# Altium PCB Analog.PcbDoc (part 2 of 2)
Units mil, origin at the board's own origin, x right, y up, seen from the top; angles counter-clockwise.
Board outline 2755 x 2460 mil, 4 copper layers (Top Layer, Power, Ground, Bottom Layer), stack 30.634 mil thick; 173 components, 144 nets, 556 pads, 140 vias.
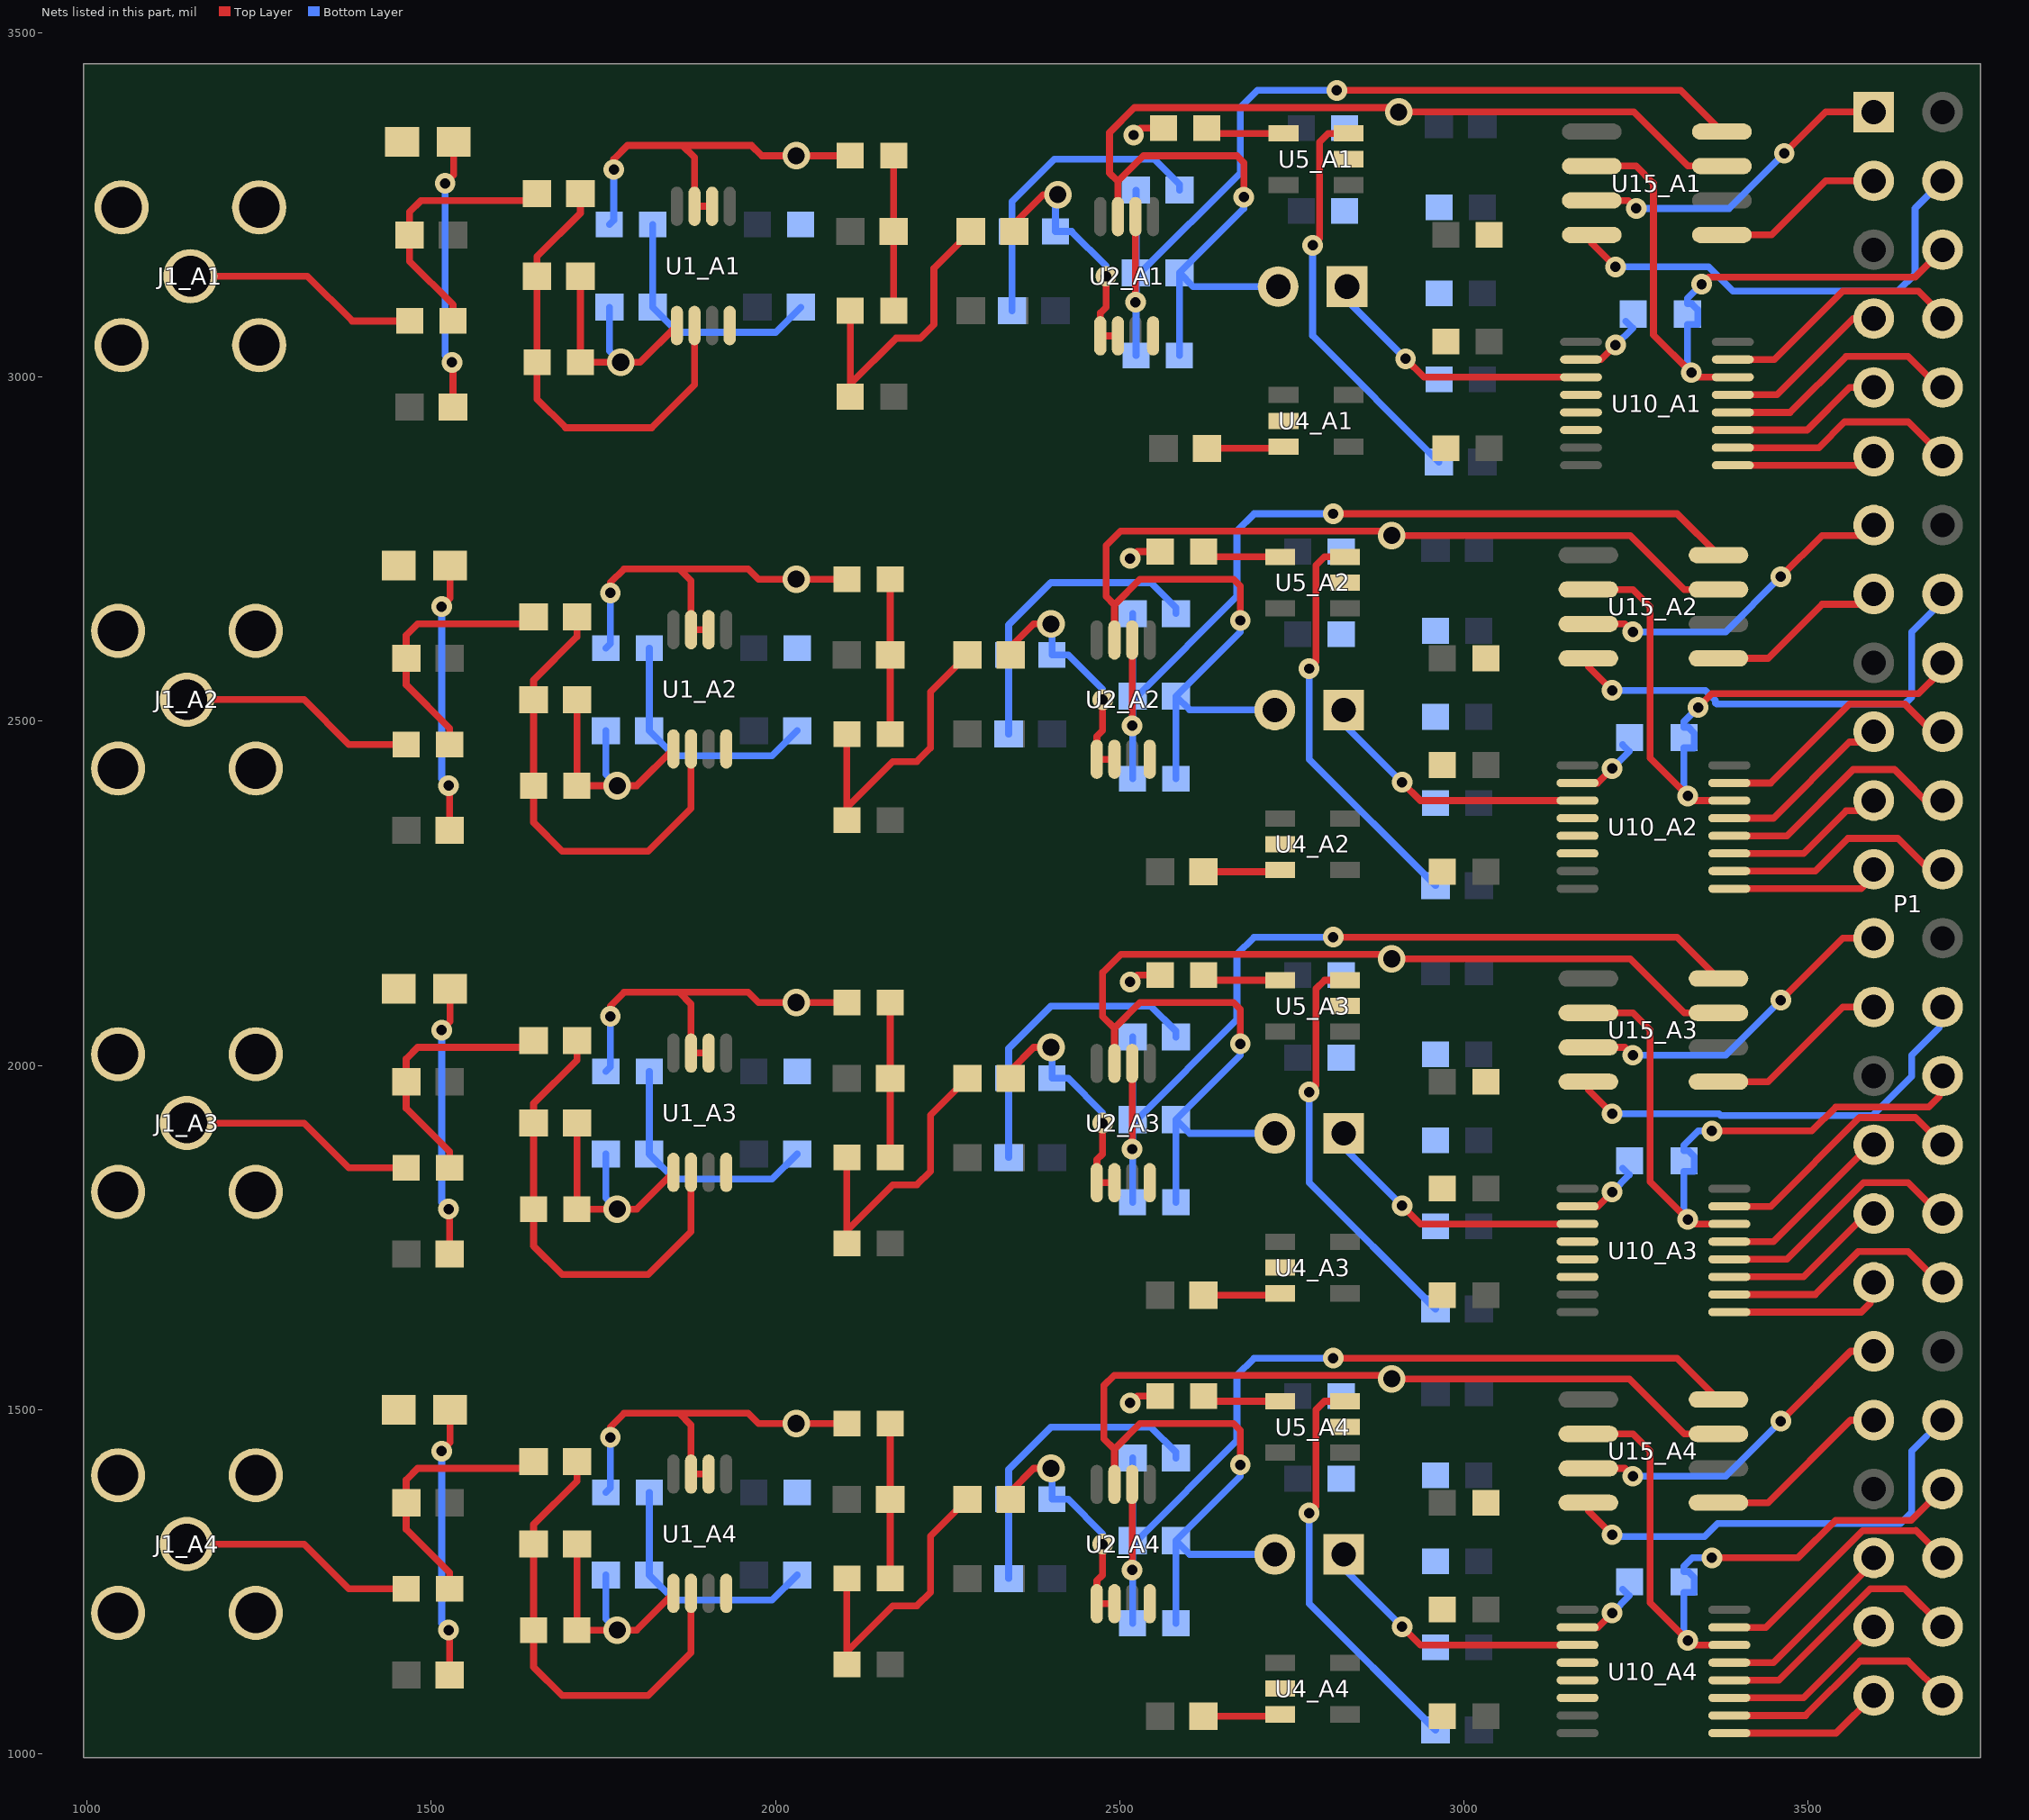
[diagram p4: the nets of this part, all layers, seen from the top]

## Via types
v1: diameter 30, hole 15, Top Layer to Bottom Layer, tented both sides, 124 vias
v2: diameter 40, hole 25, Top Layer to Bottom Layer, 16 vias

## Nets (pads, with @x,y where several pads share a name; then routed paths per layer and width w, separated by ;. In a path a pad name is that pad's centre, name@x,y a point inside that pad or via, vN(x,y) a via of type N, cw(c..) or ccw(c..) an arc to the next point about the centre after c; other vN are vias at no path point) (continued)
+INB2_A1: C3_A1.1 DNP_A1.1 R29_A1.2 U2_A1.6 U15_A1.8 | length 1405.7
  Top Layer w10: v1(2522.8,3108.7) U2_A1.6@2522.8,3233.11 ; v1(2815,3416.5) 3314.49,3416.5 U15_A1.8@3374.49,3356.5
  Bottom Layer w10: C3_A1.1@2523.5,3031.5 DNP_A1.1@2523.5,3151.5 ; R29_A1.2@2523.5,3271.5 DNP_A1.1@2523.5,3151.5 ; v1(2815,3416.5) 2700,3416.5 2675,3391.5 2675,3296.5 2530,3151.5 DNP_A1.1@2523.5,3151.5
+INB2_A2: C3_A2.1 DNP_A2.1 R29_A2.2 U2_A2.6 U15_A2.8 | length 1405.7
  Top Layer w10: v1(2517.8,2493.7) U2_A2.6@2517.8,2618.11 ; v1(2810,2801.5) 3309.49,2801.5 U15_A2.8@3369.49,2741.5
  Bottom Layer w10: C3_A2.1@2518.5,2416.5 DNP_A2.1@2518.5,2536.5 ; R29_A2.2@2518.5,2656.5 DNP_A2.1@2518.5,2536.5 ; v1(2810,2801.5) 2695,2801.5 2670,2776.5 2670,2681.5 2525,2536.5 DNP_A2.1@2518.5,2536.5
+INB2_A3: C3_A3.1 DNP_A3.1 R29_A3.2 U2_A3.6 U15_A3.8 | length 1405.7
  Top Layer w10: v1(2517.8,1878.7) U2_A3.6@2517.8,2003.11 ; v1(2810,2186.5) 3309.49,2186.5 U15_A3.8@3369.49,2126.5
  Bottom Layer w10: C3_A3.1@2518.5,1801.5 DNP_A3.1@2518.5,1921.5 ; R29_A3.2@2518.5,2041.5 DNP_A3.1@2518.5,1921.5 ; v1(2810,2186.5) 2695,2186.5 2670,2161.5 2670,2066.5 2525,1921.5 DNP_A3.1@2518.5,1921.5
+INB2_A4: C3_A4.1 DNP_A4.1 R29_A4.2 U2_A4.6 U15_A4.8 | length 1405.7
  Top Layer w10: v1(2517.8,1267.2) U2_A4.6@2517.8,1391.61 ; v1(2810,1575) 3309.49,1575 U15_A4.8@3369.49,1515
  Bottom Layer w10: C3_A4.1@2518.5,1190 DNP_A4.1@2518.5,1310 ; R29_A4.2@2518.5,1430 DNP_A4.1@2518.5,1310 ; v1(2810,1575) 2695,1575 2670,1550 2670,1455 2525,1310 DNP_A4.1@2518.5,1310
-INA1_A1: C2_A1.1 R1_A1.1 R16_A1.2 U1_A1.2 | length 682.4
  Top Layer w10: R16_A1.2@1716.5,3266.5 1716.5,3237.99 1653.5,3175 R1_A1.1@1653.5,3146.5 C2_A1.1@1653.5,3021.5 1653.5,2967.99 1695,2926.5 1820,2926.5 1882.2,2988.7 U1_A1.2@1882.2,3074.88
-INA1_A2: C2_A2.1 R1_A2.1 R16_A2.2 U1_A2.2 | length 682.4
  Top Layer w10: R16_A2.2@1711.5,2651.5 1711.5,2622.99 1648.5,2560 R1_A2.1@1648.5,2531.5 C2_A2.1@1648.5,2406.5 1648.5,2352.99 1690,2311.5 1815,2311.5 1877.2,2373.7 U1_A2.2@1877.2,2459.88
-INA1_A3: C2_A3.1 R1_A3.1 R16_A3.2 U1_A3.2 | length 682.4
  Top Layer w10: R16_A3.2@1711.5,2036.5 1711.5,2007.99 1648.5,1945 R1_A3.1@1648.5,1916.5 C2_A3.1@1648.5,1791.5 1648.5,1737.99 1690,1696.5 1815,1696.5 1877.2,1758.7 U1_A3.2@1877.2,1844.88
-INA1_A4: C2_A4.1 R1_A4.1 R16_A4.2 U1_A4.2 | length 682.4
  Top Layer w10: R16_A4.2@1711.5,1425 1711.5,1396.5 1648.5,1333.5 R1_A4.1@1648.5,1305 C2_A4.1@1648.5,1180 1648.5,1126.5 1690,1085 1815,1085 1877.2,1147.2 U1_A4.2@1877.2,1233.39
ADC_CE1: P1.9 U10_A1.11 | length 230.4
  Top Layer w10: U10_A1.11@3390.24,2923.11 3498.11,2923.11 3560,2985 P1.9@3595,2985
ADC_CE2: P1.21 U10_A2.11 | length 230.4
  Top Layer w10: U10_A2.11@3385.24,2308.11 3493.11,2308.11 3555,2370 P1.21@3590,2370
ADC_CE3: P1.33 U10_A3.11 | length 244.9
  Top Layer w10: U10_A3.11@3385.24,1693.11 3493.11,1693.11 P1.33@3590,1790
ADC_CE4: P1.45 U10_A4.11 | length 244.9
  Top Layer w10: U10_A4.11@3385.24,1081.61 3493.11,1081.61 P1.45@3590,1178.5
ADC_MISO1: P1.7 U10_A1.13 | length 250.6
  Top Layer w10: U10_A1.13@3390.24,2974.29 3454.29,2974.29 3565,3085 P1.7@3595,3085
ADC_MISO2: P1.19 U10_A2.13 | length 250.6
  Top Layer w10: U10_A2.13@3385.24,2359.29 3449.29,2359.29 3560,2470 P1.19@3590,2470
ADC_MISO3: P1.31 U10_A3.13 | length 266.6
  Top Layer w10: U10_A3.13@3385.24,1744.29 3449.29,1744.29 P1.31@3592.5,1887.5
ADC_MISO4: P1.43 U10_A4.13 | length 263
  Top Layer w10: U10_A4.13@3385.24,1132.8 3449.29,1132.8 P1.43@3590,1273.5
ADC_MOSI1: P1.10 U10_A1.12 | length 357.1
  Top Layer w10: U10_A1.12@3390.24,2948.7 3473.7,2948.7 3555,3030 3645,3030 3690,2985 P1.10@3695,2985
ADC_MOSI2: P1.22 U10_A2.12 | length 369.5
  Top Layer w10: U10_A2.12@3385.24,2333.7 3468.7,2333.7 3565,2430 3625,2430 3685,2370 P1.22@3690,2370
ADC_MOSI3: P1.34 U10_A3.12 | length 404.5
  Top Layer w10: U10_A3.12@3385.24,1718.7 3468.7,1718.7 3580,1830 3645,1830 P1.34@3690,1785 ; P1.34@3677.5,1767.5 P1.34@3677.5,1802.5
ADC_MOSI4: P1.46 U10_A4.12 | length 387.6
  Top Layer w10: U10_A4.12@3385.24,1107.2 3457.2,1107.2 3590,1240 3640,1240 P1.46@3695,1185
ADC_SCK1: P1.8 U10_A1.15 | length 365.5
  Top Layer w10: U10_A1.15@3390.24,3025.47 3450.47,3025.47 3550,3125 3660,3125 3695,3090 P1.8@3695,3085
ADC_SCK2: P1.20 U10_A2.15 | length 377.9
  Top Layer w10: U10_A2.15@3385.24,2410.47 3445.47,2410.47 3560,2525 3640,2525 3690,2475 P1.20@3690,2470
ADC_SCK3: P1.32 U10_A3.15 | length 379.6
  Top Layer w10: U10_A3.15@3385.24,1795.47 3445.47,1795.47 3574.53,1924.53 3655.47,1924.53 P1.32@3695,1885
ADC_SCK4: P1.44 U10_A4.15 | length 385.5
  Top Layer w10: U10_A4.15@3385.24,1183.98 3438.08,1183.98 3578.63,1324.53 3655.74,1324.53 3656.21,1325 3695,1286.21 P1.44@3695,1285
AGND_A1: C1_A1.1 C5_A1.1 C6_A1.1 C7_A1.1 C8_A1.1 C42_A1.1 C50_A1.2 C61_A1.2 C62_A1.2 C63_A1.2 D1_A1.1 J1_A1.2 NT1_A1.1 U1_A1.4 U2_A1.4 U4_A1.2 U5_A1.2 U10_A1.2 U10_A1.4 U10_A1.5 U10_A1.6 | length 155.8
  Top Layer w10: v1(2520,3351.5) 2530,3361.5 C8_A1.1@2563.5,3361.5 ; U10_A1.2@3169.76,3025.47 3198.98,3025.47 v1(3220,3046.5)
  Bottom Layer w10: v1(3220,3046.5) 3245,3071.5 3244.42,3071.5 NT1_A1.1@3235.02,3080.89
AGND_A2: C1_A2.1 C5_A2.1 C6_A2.1 C7_A2.1 C8_A2.1 C42_A2.1 C50_A2.2 C61_A2.2 C62_A2.2 C63_A2.2 D1_A2.1 J1_A2.2 NT1_A2.1 U1_A2.4 U2_A2.4 U4_A2.2 U5_A2.2 U10_A2.2 U10_A2.4 U10_A2.5 U10_A2.6 | length 155.8
  Top Layer w10: v1(2515,2736.5) 2525,2746.5 C8_A2.1@2558.5,2746.5 ; U10_A2.2@3164.76,2410.47 3193.98,2410.47 v1(3215,2431.5)
  Bottom Layer w10: v1(3215,2431.5) 3240,2456.5 3239.42,2456.5 NT1_A2.1@3230.02,2465.89
AGND_A3: C1_A3.1 C5_A3.1 C6_A3.1 C7_A3.1 C8_A3.1 C42_A3.1 C50_A3.2 C61_A3.2 C62_A3.2 C63_A3.2 D1_A3.1 J1_A3.2 NT1_A3.1 U1_A3.4 U2_A3.4 U4_A3.2 U5_A3.2 U10_A3.2 U10_A3.4 U10_A3.5 U10_A3.6 | length 155.8
  Top Layer w10: v1(2515,2121.5) 2525,2131.5 C8_A3.1@2558.5,2131.5 ; U10_A3.2@3164.76,1795.47 3193.98,1795.47 v1(3215,1816.5)
  Bottom Layer w10: v1(3215,1816.5) 3240,1841.5 3239.42,1841.5 NT1_A3.1@3230.02,1850.89
AGND_A4: C1_A4.1 C5_A4.1 C6_A4.1 C7_A4.1 C8_A4.1 C42_A4.1 C50_A4.2 C61_A4.2 C62_A4.2 C63_A4.2 D1_A4.1 J1_A4.2 NT1_A4.1 U1_A4.4 U2_A4.4 U4_A4.2 U5_A4.2 U10_A4.2 U10_A4.4 U10_A4.5 U10_A4.6 | length 155.8
  Top Layer w10: v1(2515,1510) 2525,1520 C8_A4.1@2558.5,1520 ; U10_A4.2@3164.76,1183.98 3193.98,1183.98 v1(3215,1205)
  Bottom Layer w10: v1(3215,1205) 3240,1230 3239.42,1230 NT1_A4.1@3230.02,1239.39
CONVST1: P1.11 U10_A1.9 | length 210.2
  Top Layer w10: U10_A1.9@3390.24,2871.93 3581.93,2871.93 P1.11@3595,2885
CONVST2: P1.23 U10_A2.9 | length 210.2
  Top Layer w10: U10_A2.9@3385.24,2256.93 3576.93,2256.93 P1.23@3590,2270
CONVST3: P1.35 U10_A3.9 | length 210.2
  Top Layer w10: U10_A3.9@3385.24,1641.93 3576.93,1641.93 3590,1655
CONVST4: P1.47 U10_A4.9 | length 232.4
  Top Layer w10: U10_A4.9@3385.24,1030.43 3540.43,1030.43 P1.47@3595,1085
DGND1: NT1_A1.2 P1.6 U10_A1.14 U15_A1.2 | length 995.5
  Top Layer w10: U15_A1.2@3185.51,3306.5 3250,3306.5 3275,3281.5 3275,3061.5 v1(3330,3006.5) 3336.61,2999.88 U10_A1.14@3390.24,2999.88 ; v1(3345,3135) 3355,3145 3655,3145 P1.6@3695,3185
  Bottom Layer w10: v1(3330,3006.5) 3324.37,3012.13 3324.37,3076.5 3339.37,3076.5 3339.37,3097.71 3330.58,3106.5 3324.37,3106.5 3324.37,3114.37 v1(3345,3135)
DGND2: NT1_A2.2 P1.18 U10_A2.14 U15_A2.2 | length 995.5
  Top Layer w10: U15_A2.2@3180.51,2691.5 3245,2691.5 3270,2666.5 3270,2446.5 v1(3325,2391.5) 3331.61,2384.88 U10_A2.14@3385.24,2384.88 ; v1(3340,2520) 3360,2540 3660,2540 P1.18@3690,2570
  Bottom Layer w10: v1(3325,2391.5) 3319.37,2397.13 3319.37,2461.5 3334.37,2461.5 3334.37,2482.71 3325.58,2491.5 3319.37,2491.5 3319.37,2499.37 v1(3340,2520)
DGND3: NT1_A3.2 P1.30 U10_A3.14 U15_A3.2 | length 995.5
  Top Layer w10: U15_A3.2@3180.51,2076.5 3245,2076.5 3270,2051.5 3270,1831.5 v1(3325,1776.5) 3331.61,1769.88 U10_A3.14@3385.24,1769.88 ; v1(3360,1905) 3505,1905 3540,1940 3675,1940 3690,1955
  Bottom Layer w10: v1(3325,1776.5) 3319.37,1782.13 3319.37,1846.5 3334.37,1846.5 3334.37,1867.71 3325.58,1876.5 3319.37,1876.5 3319.37,1884.37 3340,1905 v1(3360,1905)
DGND4: NT1_A4.2 P1.42 U10_A4.14 U15_A4.2 | length 1017.7
  Top Layer w10: U15_A4.2@3180.51,1465 3245,1465 3270,1440 3270,1220 v1(3325,1165) 3331.61,1158.39 U10_A4.14@3385.24,1158.39 ; v1(3360,1285) 3485,1285 3539.53,1339.53 3649.53,1339.53 P1.42@3695,1385
  Bottom Layer w10: v1(3325,1165) 3319.37,1170.63 3319.37,1235 3334.37,1235 3334.37,1256.21 3325.58,1265 3319.37,1265 3319.37,1272.87 3331.5,1285 v1(3360,1285)
EOC1: P1.12 U10_A1.10 | length 341
  Top Layer w10: U10_A1.10@3390.24,2897.52 3515.15,2897.52 3552.63,2935 3645,2935 P1.12@3695,2885
EOC2: P1.24 U10_A2.10 | length 349.3
  Top Layer w10: U10_A2.10@3385.24,2282.52 3510.15,2282.52 3557.63,2330 3630,2330 P1.24@3690,2270
EOC3: P1.36 U10_A3.10 | length 370.5
  Top Layer w10: U10_A3.10@3385.24,1667.52 3510.15,1667.52 3572.63,1730 3645,1730 P1.36@3705,1670
EOC4: P1.48 U10_A4.10 | length 363.2
  Top Layer w10: U10_A4.10@3385.24,1056.02 3496.02,1056.02 3575,1135 3645,1135 P1.48@3695,1085
NetBP_A1_1: BP_A1.1 U10_A1.3 | length 406
  Top Layer w10: v1(2915,3026.5) 2941.61,2999.88 U10_A1.3@3169.76,2999.88
  Bottom Layer w10: BP_A1.1@2830,3131.5 2830,3111.5 v1(2915,3026.5)
NetBP_A2_1: BP_A2.1 U10_A2.3 | length 406
  Top Layer w10: v1(2910,2411.5) 2936.61,2384.88 U10_A2.3@3164.76,2384.88
  Bottom Layer w10: BP_A2.1@2825,2516.5 2825,2496.5 v1(2910,2411.5)
NetBP_A3_1: BP_A3.1 U10_A3.3 | length 406
  Top Layer w10: v1(2910,1796.5) 2936.61,1769.88 U10_A3.3@3164.76,1769.88
  Bottom Layer w10: BP_A3.1@2825,1901.5 2825,1881.5 v1(2910,1796.5)
NetBP_A4_1: BP_A4.1 U10_A4.3 | length 406
  Top Layer w10: v1(2910,1185) 2936.61,1158.39 U10_A4.3@3164.76,1158.39
  Bottom Layer w10: BP_A4.1@2825,1290 2825,1270 v1(2910,1185)
NetC4_A1_2: C4_A1.2 R2_A1.2 R16_A1.1 | length 380.6
  Top Layer w10: C4_A1.2@1531.5,3081.5 1531.5,3105 1468.5,3167.99 R2_A1.2@1468.5,3206.5 1468.5,3240 1485,3256.5 1643.5,3256.5 R16_A1.1@1653.5,3266.5
NetC4_A2_2: C4_A2.2 R2_A2.2 R16_A2.1 | length 380.6
  Top Layer w10: C4_A2.2@1526.5,2466.5 1526.5,2490 1463.5,2552.99 R2_A2.2@1463.5,2591.5 1463.5,2625 1480,2641.5 1638.5,2641.5 R16_A2.1@1648.5,2651.5
NetC4_A3_2: C4_A3.2 R2_A3.2 R16_A3.1 | length 380.6
  Top Layer w10: C4_A3.2@1526.5,1851.5 1526.5,1875 1463.5,1937.99 R2_A3.2@1463.5,1976.5 1463.5,2010 1480,2026.5 1638.5,2026.5 R16_A3.1@1648.5,2036.5
NetC4_A4_2: C4_A4.2 R2_A4.2 R16_A4.1 | length 380.6
  Top Layer w10: C4_A4.2@1526.5,1240 1526.5,1263.5 1463.5,1326.5 R2_A4.2@1463.5,1365 1463.5,1398.5 1480,1415 1638.5,1415 R16_A4.1@1648.5,1425
NetC8_A1_2: C8_A1.2 U5_A1.4 | length 114.4
  Top Layer w10: C8_A1.2@2626.5,3361.5 2634.09,3353.9 U5_A1.4@2737.76,3353.9
NetC8_A2_2: C8_A2.2 U5_A2.4 | length 114.4
  Top Layer w10: C8_A2.2@2621.5,2746.5 2629.09,2738.9 U5_A2.4@2732.76,2738.9
NetC8_A3_2: C8_A3.2 U5_A3.4 | length 114.4
  Top Layer w10: C8_A3.2@2621.5,2131.5 2629.09,2123.9 U5_A3.4@2732.76,2123.9
NetC8_A4_2: C8_A4.2 U5_A4.4 | length 114.4
  Top Layer w10: C8_A4.2@2621.5,1520 2629.09,1512.4 U5_A4.4@2732.76,1512.4
NetC23_A1_2: C23_A1.2 C27_A1.1 R3_A1.2 | length 225
  Top Layer w10: C27_A1.1@2171.5,3096.5 R3_A1.2@2171.5,3211.5 C23_A1.2@2171.5,3321.5
NetC23_A2_2: C23_A2.2 C27_A2.1 R3_A2.2 | length 225
  Top Layer w10: C27_A2.1@2166.5,2481.5 R3_A2.2@2166.5,2596.5 C23_A2.2@2166.5,2706.5
NetC23_A3_2: C23_A3.2 C27_A3.1 R3_A3.2 | length 225
  Top Layer w10: C27_A3.1@2166.5,1866.5 R3_A3.2@2166.5,1981.5 C23_A3.2@2166.5,2091.5
NetC23_A4_2: C23_A4.2 C27_A4.1 R3_A4.2 | length 225
  Top Layer w10: C27_A4.1@2166.5,1255 R3_A4.2@2166.5,1370 C23_A4.2@2166.5,1480
NetC27_A1_2: C27_A1.2 C28_A1.1 R39_A1.1 | length 439.5
  Top Layer w10: C28_A1.1@2108.5,2971.5 C28_A1.1@2108.5,2990 ; C27_A1.2@2108.5,3096.5 C28_A1.1@2108.5,2990 ; R39_A1.1@2283.5,3211.5 2230,3157.99 2230,3076.5 2210,3056.5 2175,3056.5 C28_A1.1@2108.5,2990
NetC27_A2_2: C27_A2.2 C28_A2.1 R39_A2.1 | length 439.5
  Top Layer w10: C28_A2.1@2103.5,2356.5 C28_A2.1@2103.5,2375 ; C27_A2.2@2103.5,2481.5 C28_A2.1@2103.5,2375 ; R39_A2.1@2278.5,2596.5 2225,2542.99 2225,2461.5 2205,2441.5 2170,2441.5 C28_A2.1@2103.5,2375
NetC27_A3_2: C27_A3.2 C28_A3.1 R39_A3.1 | length 439.5
  Top Layer w10: C28_A3.1@2103.5,1741.5 C28_A3.1@2103.5,1760 ; C27_A3.2@2103.5,1866.5 C28_A3.1@2103.5,1760 ; R39_A3.1@2278.5,1981.5 2225,1927.99 2225,1846.5 2205,1826.5 2170,1826.5 C28_A3.1@2103.5,1760
NetC27_A4_2: C27_A4.2 C28_A4.1 R39_A4.1 | length 439.5
  Top Layer w10: C28_A4.1@2103.5,1130 C28_A4.1@2103.5,1148.5 ; C27_A4.2@2103.5,1255 C28_A4.1@2103.5,1148.5 ; R39_A4.1@2278.5,1370 2225,1316.5 2225,1235 2205,1215 2170,1215 C28_A4.1@2103.5,1148.5
NetC41_A1_2: C41_A1.2 R4_A1.2 R29_A1.1 | length 450.6
  Bottom Layer w10: R4_A1.2@2343.5,3096.5 C41_A1.2@2343.5,3211.5 2343.5,3255 2405,3316.5 2550,3316.5 2586.5,3280 R29_A1.1@2586.5,3271.5
NetC41_A2_2: C41_A2.2 R4_A2.2 R29_A2.1 | length 450.6
  Bottom Layer w10: R4_A2.2@2338.5,2481.5 C41_A2.2@2338.5,2596.5 2338.5,2640 2400,2701.5 2545,2701.5 2581.5,2665 R29_A2.1@2581.5,2656.5
NetC41_A3_2: C41_A3.2 R4_A3.2 R29_A3.1 | length 450.6
  Bottom Layer w10: R4_A3.2@2338.5,1866.5 C41_A3.2@2338.5,1981.5 2338.5,2025 2400,2086.5 2545,2086.5 2581.5,2050 R29_A3.1@2581.5,2041.5
NetC41_A4_2: C41_A4.2 R4_A4.2 R29_A4.1 | length 450.6
  Bottom Layer w10: R4_A4.2@2338.5,1255 C41_A4.2@2338.5,1370 2338.5,1413.5 2400,1475 2545,1475 2581.5,1438.5 R29_A4.1@2581.5,1430
NetC43_A1_2: C43_A1.2 R32_A1.2 R33_A1.1 | length 365.2
  Bottom Layer w10: C43_A1.2@1821.5,3221.5 R32_A1.2@1821.5,3101.5 1857.99,3065 2000,3065 R33_A1.1@2036.5,3101.5
NetC43_A2_2: C43_A2.2 R32_A2.2 R33_A2.1 | length 365.2
  Bottom Layer w10: C43_A2.2@1816.5,2606.5 R32_A2.2@1816.5,2486.5 1852.99,2450 1995,2450 R33_A2.1@2031.5,2486.5
NetC43_A3_2: C43_A3.2 R32_A3.2 R33_A3.1 | length 365.2
  Bottom Layer w10: C43_A3.2@1816.5,1991.5 R32_A3.2@1816.5,1871.5 1852.99,1835 1995,1835 R33_A3.1@2031.5,1871.5
NetC43_A4_2: C43_A4.2 R32_A4.2 R33_A4.1 | length 365.2
  Bottom Layer w10: C43_A4.2@1816.5,1380 R32_A4.2@1816.5,1260 1852.99,1223.5 1995,1223.5 R33_A4.1@2031.5,1260
NetD1_A1_2: D1_A1.2 R7_A1.2 | length 392.8
  Top Layer w10: v1(1520,3281.5) 1532.4,3293.9 D1_A1.2@1532.4,3341.5 ; R7_A1.2@1531.5,2956.5 v1@1531.5,3020
  Bottom Layer w10: v1(1520,3281.5) 1520,3031.5 v1(1530,3021.5)
NetD1_A2_2: D1_A2.2 R7_A2.2 | length 392.8
  Top Layer w10: v1(1515,2666.5) 1527.4,2678.9 D1_A2.2@1527.4,2726.5 ; R7_A2.2@1526.5,2341.5 v1@1526.5,2405
  Bottom Layer w10: v1(1515,2666.5) 1515,2416.5 v1(1525,2406.5)
NetD1_A3_2: D1_A3.2 R7_A3.2 | length 392.8
  Top Layer w10: v1(1515,2051.5) 1527.4,2063.9 D1_A3.2@1527.4,2111.5 ; R7_A3.2@1526.5,1726.5 v1@1526.5,1790
  Bottom Layer w10: v1(1515,2051.5) 1515,1801.5 v1(1525,1791.5)
NetD1_A4_2: D1_A4.2 R7_A4.2 | length 392.8
  Top Layer w10: v1(1515,1440) 1527.4,1452.4 D1_A4.2@1527.4,1500 ; R7_A4.2@1526.5,1115 v1@1526.5,1178.5
  Bottom Layer w10: v1(1515,1440) 1515,1190 v1(1525,1180)
NetR5_A1_1: R5_A1.1 U4_A1.3 | length 112.3
  Top Layer w10: R5_A1.1@2626.5,2896.5 2735.16,2896.5 U4_A1.3@2737.76,2899.09
NetR5_A2_1: R5_A2.1 U4_A2.3 | length 112.3
  Top Layer w10: R5_A2.1@2621.5,2281.5 2730.16,2281.5 U4_A2.3@2732.76,2284.09
NetR5_A3_1: R5_A3.1 U4_A3.3 | length 112.3
  Top Layer w10: R5_A3.1@2621.5,1666.5 2730.16,1666.5 U4_A3.3@2732.76,1669.09
NetR5_A4_1: R5_A4.1 U4_A4.3 | length 112.3
  Top Layer w10: R5_A4.1@2621.5,1055 2730.16,1055 U4_A4.3@2732.76,1057.6
NetR8_A1_1: R8_A1.1 U5_A1.3 | length 592.5
  Top Layer w10: v1(2780,3191.5) 2790,3201.5 2790,3341.5 2802.4,3353.9 U5_A1.3@2832.24,3353.9
  Bottom Layer w10: v1(2780,3191.5) 2780,3060 R8_A1.1@2963.5,2876.5
NetR8_A2_1: R8_A2.1 U5_A2.3 | length 592.5
  Top Layer w10: v1(2775,2576.5) 2785,2586.5 2785,2726.5 2797.4,2738.9 U5_A2.3@2827.24,2738.9
  Bottom Layer w10: v1(2775,2576.5) 2775,2445 R8_A2.1@2958.5,2261.5
NetR8_A3_1: R8_A3.1 U5_A3.3 | length 592.5
  Top Layer w10: v1(2775,1961.5) 2785,1971.5 2785,2111.5 2797.4,2123.9 U5_A3.3@2827.24,2123.9
  Bottom Layer w10: v1(2775,1961.5) 2775,1830 R8_A3.1@2958.5,1646.5
NetR8_A4_1: R8_A4.1 U5_A4.3 | length 592.5
  Top Layer w10: v1(2775,1350) 2785,1360 2785,1500 2797.4,1512.4 U5_A4.3@2827.24,1512.4
  Bottom Layer w10: v1(2775,1350) 2775,1218.5 R8_A4.1@2958.5,1035
OUTA1_A1: C2_A1.2 R1_A1.2 R32_A1.1 U1_A1.1 | length 374.1
  Top Layer w10: R1_A1.2@1716.5,3146.5 C2_A1.2@1716.5,3021.5 v2(1775,3021.5) 1803.23,3021.5 U1_A1.1@1856.61,3074.88
  Bottom Layer w10: R32_A1.1@1758.5,3101.5 1758.5,3037.99 v2(1775,3021.5)
OUTA1_A2: C2_A2.2 R1_A2.2 R32_A2.1 U1_A2.1 | length 374.1
  Top Layer w10: R1_A2.2@1711.5,2531.5 C2_A2.2@1711.5,2406.5 v2(1770,2406.5) 1798.23,2406.5 U1_A2.1@1851.61,2459.88
  Bottom Layer w10: R32_A2.1@1753.5,2486.5 1753.5,2422.99 v2(1770,2406.5)
OUTA1_A3: C2_A3.2 R1_A3.2 R32_A3.1 U1_A3.1 | length 374.1
  Top Layer w10: R1_A3.2@1711.5,1916.5 C2_A3.2@1711.5,1791.5 v2(1770,1791.5) 1798.23,1791.5 U1_A3.1@1851.61,1844.88
  Bottom Layer w10: R32_A3.1@1753.5,1871.5 1753.5,1807.99 v2(1770,1791.5)
OUTA1_A4: C2_A4.2 R1_A4.2 R32_A4.1 U1_A4.1 | length 374.1
  Top Layer w10: R1_A4.2@1711.5,1305 C2_A4.2@1711.5,1180 v2(1770,1180) 1798.23,1180 U1_A4.1@1851.61,1233.39
  Bottom Layer w10: R32_A4.1@1753.5,1260 1753.5,1196.5 v2(1770,1180)
OUTA2_A1: C41_A1.1 R39_A1.2 U2_A1.1 U2_A1.2 | length 372.2
  Top Layer w10: R39_A1.2@2346.5,3211.5 2346.5,3222.99 2388.5,3265 v2(2410,3265) ; v1(2480,3146.5) 2480,3101.5 2471.61,3093.11 U2_A1.1@2471.61,3059.88 U2_A1.2@2497.2,3059.88
  Bottom Layer w10: v2(2410,3265) 2406.5,3261.5 C41_A1.1@2406.5,3211.5 2430,3211.5 2480,3161.5 v1(2480,3146.5)
OUTA2_A2: C41_A2.1 R39_A2.2 U2_A2.1 U2_A2.2 | length 354.4
  Top Layer w10: R39_A2.2@2341.5,2596.5 2341.5,2607.99 2375,2641.5 v2(2400,2641.5) ; v1(2475,2531.5) 2475,2486.5 2466.61,2478.11 U2_A2.1@2466.61,2444.88 U2_A2.2@2492.2,2444.88
  Bottom Layer w10: v2(2400,2641.5) 2401.5,2640 C41_A2.1@2401.5,2596.5 2425,2596.5 2475,2546.5 v1(2475,2531.5)
OUTA2_A3: C41_A3.1 R39_A3.2 U2_A3.1 U2_A3.2 | length 354.4
  Top Layer w10: R39_A3.2@2341.5,1981.5 2341.5,1992.99 2375,2026.5 v2(2400,2026.5) ; v1(2475,1916.5) 2475,1871.5 2466.61,1863.11 U2_A3.1@2466.61,1829.88 U2_A3.2@2492.2,1829.88
  Bottom Layer w10: v2(2400,2026.5) 2401.5,2025 C41_A3.1@2401.5,1981.5 2425,1981.5 2475,1931.5 v1(2475,1916.5)
OUTA2_A4: C41_A4.1 R39_A4.2 U2_A4.1 U2_A4.2 | length 354.4
  Top Layer w10: R39_A4.2@2341.5,1370 2341.5,1381.5 2375,1415 v2(2400,1415) ; v1(2475,1305) 2475,1260 2466.61,1251.61 U2_A4.1@2466.61,1218.39 U2_A4.2@2492.2,1218.39
  Bottom Layer w10: v2(2400,1415) 2401.5,1413.5 C41_A4.1@2401.5,1370 2425,1370 2475,1320 v1(2475,1305)
OUTB1_A1: C23_A1.1 C43_A1.1 U1_A1.6 U1_A1.7 | length 576.8
  Top Layer w10: v1(1765,3301.5) 1765,3316.5 1785,3336.5 1865,3336.5 ; U1_A1.6@1907.8,3248.11 U1_A1.7@1882.2,3248.11 1882.2,3319.29 1865,3336.5 ; C23_A1.1@2108.5,3321.5 v2(2030,3321.5) 1980,3321.5 1965,3336.5 1865,3336.5
  Bottom Layer w10: C43_A1.1@1758.5,3221.5 1765,3227.99 v1(1765,3301.5)
OUTB1_A2: C23_A2.1 C43_A2.1 U1_A2.6 U1_A2.7 | length 576.8
  Top Layer w10: v1(1760,2686.5) 1760,2701.5 1780,2721.5 1860,2721.5 ; U1_A2.6@1902.8,2633.11 U1_A2.7@1877.2,2633.11 1877.2,2704.29 1860,2721.5 ; C23_A2.1@2103.5,2706.5 v2(2030,2706.5) 1975,2706.5 1960,2721.5 1860,2721.5
  Bottom Layer w10: C43_A2.1@1753.5,2606.5 1760,2612.99 v1(1760,2686.5)
OUTB1_A3: C23_A3.1 C43_A3.1 U1_A3.6 U1_A3.7 | length 576.8
  Top Layer w10: v1(1760,2071.5) 1760,2086.5 1780,2106.5 1860,2106.5 ; U1_A3.6@1902.8,2018.11 U1_A3.7@1877.2,2018.11 1877.2,2089.29 1860,2106.5 ; C23_A3.1@2103.5,2091.5 v2(2030,2091.5) 1975,2091.5 1960,2106.5 1860,2106.5
  Bottom Layer w10: C43_A3.1@1753.5,1991.5 1760,1997.99 v1(1760,2071.5)
OUTB1_A4: C23_A4.1 C43_A4.1 U1_A4.6 U1_A4.7 | length 576.8
  Top Layer w10: v1(1760,1460) 1760,1475 1780,1495 1860,1495 ; U1_A4.6@1902.8,1406.61 U1_A4.7@1877.2,1406.61 1877.2,1477.8 1860,1495 ; C23_A4.1@2103.5,1480 v2(2030,1480) 1975,1480 1960,1495 1860,1495
  Bottom Layer w10: C43_A4.1@1753.5,1380 1760,1386.5 v1(1760,1460)
OUTB2_A1: BP_A1.2 C3_A1.2 DNP_A1.2 U2_A1.7 U15_A1.7 | length 1730.4
  Top Layer w10: U2_A1.7@2497.2,3233.11 2497.2,3284.29 ; v1(2680,3261.5) 2680,3311.5 2670,3321.5 2534.41,3321.5 2497.2,3284.29 ; v2@2898.5,3391.5 2521.5,3391.5 2485,3355 2485,3296.5 2497.2,3284.29 ; v2(2905,3385) 3246.5,3385 3325,3306.5 U15_A1.7@3374.49,3306.5
  Bottom Layer w10: C3_A1.2@2586.5,3031.5 DNP_A1.2@2586.5,3151.5 ; v1(2680,3261.5) 2680,3245 DNP_A1.2@2586.5,3151.5 ; BP_A1.2@2730,3131.5 2606.5,3131.5 DNP_A1.2@2586.5,3151.5
OUTB2_A2: BP_A2.2 C3_A2.2 DNP_A2.2 U2_A2.7 U15_A2.7 | length 1739.4
  Top Layer w10: U2_A2.7@2492.2,2618.11 2492.2,2669.29 ; v1(2675,2646.5) 2675,2696.5 2665,2706.5 2529.41,2706.5 2492.2,2669.29 ; v2@2888.5,2776.5 2501.28,2776.5 2480,2755.21 2480,2681.5 2492.2,2669.29 ; v2(2895,2770) 3241.5,2770 3320,2691.5 U15_A2.7@3369.49,2691.5
  Bottom Layer w10: C3_A2.2@2581.5,2416.5 DNP_A2.2@2581.5,2536.5 ; v1(2675,2646.5) 2675,2630 DNP_A2.2@2581.5,2536.5 ; BP_A2.2@2725,2516.5 2601.5,2516.5 DNP_A2.2@2581.5,2536.5
OUTB2_A3: BP_A3.2 C3_A3.2 DNP_A3.2 U2_A3.7 U15_A3.7 | length 1743.4
  Top Layer w10: U2_A3.7@2492.2,2003.11 2492.2,2054.29 ; v1(2675,2031.5) 2675,2081.5 2665,2091.5 2529.41,2091.5 2492.2,2054.29 ; v2@2888.5,2161.5 2501.5,2161.5 2475,2135 2475,2071.5 2492.2,2054.29 ; v2(2895,2155) 3241.5,2155 3320,2076.5 U15_A3.7@3369.49,2076.5
  Bottom Layer w10: C3_A3.2@2581.5,1801.5 DNP_A3.2@2581.5,1921.5 ; v1(2675,2031.5) 2675,2015 DNP_A3.2@2581.5,1921.5 ; BP_A3.2@2725,1901.5 2601.5,1901.5 DNP_A3.2@2581.5,1921.5
OUTB2_A4: BP_A4.2 C3_A4.2 DNP_A4.2 U2_A4.7 U15_A4.7 | length 1749.6
  Top Layer w10: U2_A4.7@2492.2,1391.61 2492.2,1442.8 ; v1(2675,1420) 2675,1470 2665,1480 2529.41,1480 2492.2,1442.8 ; v2@2890,1550 2491.68,1550 2477.01,1535.33 2477.01,1457.99 2492.2,1442.8 ; v2(2895,1545) 3240,1545 3320,1465 U15_A4.7@3369.49,1465
  Bottom Layer w10: C3_A4.2@2581.5,1190 DNP_A4.2@2581.5,1310 ; v1(2675,1420) 2675,1403.5 DNP_A4.2@2581.5,1310 ; BP_A4.2@2725,1290 2601.5,1290 DNP_A4.2@2581.5,1310
POT_CE1: P1.1 U15_A1.3 | length 479.3
  Top Layer w10: U15_A1.3@3185.51,3256.5 3238.5,3256.5 v1(3250,3245) v1@3255,3240 ; v1(3465,3325) 3525,3385 P1.1@3595,3385
  Bottom Layer w10: v1(3250,3245) 3385,3245 v1(3465,3325)
POT_CE2: P1.13 U15_A2.3 | length 479.3
  Top Layer w10: U15_A2.3@3180.51,2641.5 3233.5,2641.5 v1(3245,2630) v1@3250,2625 ; v1(3460,2710) 3520,2770 P1.13@3590,2770
  Bottom Layer w10: v1(3245,2630) 3380,2630 v1(3460,2710)
POT_CE3: P1.25 U15_A3.3 | length 491.7
  Top Layer w10: U15_A3.3@3180.51,2026.5 3233.5,2026.5 v1(3245,2015) v1@3250,2010 ; v1(3460,2095) 3550,2185 P1.25@3590,2185
  Bottom Layer w10: v1(3245,2015) 3380,2015 v1(3460,2095)
POT_CE4: P1.37 U15_A4.3 | length 496.5
  Top Layer w10: U15_A4.3@3180.51,1415 3233.5,1415 v1(3245,1403.5) v1@3250,1398.5 ; v1(3460,1483.5) 3561.5,1585 P1.37@3590,1585
  Bottom Layer w10: v1(3245,1403.5) 3380,1403.5 v1(3460,1483.5)
POT_MOSI1: P1.4 U15_A1.4 | length 673.2
  Top Layer w10: U15_A1.4@3185.51,3206.5 3185.51,3194.49 v1(3220,3160)
  Bottom Layer w10: v1@3220,3157.5 3222.5,3160 3355.36,3160 3390.36,3125 3630,3125 3655,3150 3655,3245 P1.4@3695,3285
POT_MOSI2: P1.16 U15_A2.4 | length 662.9
  Top Layer w10: U15_A2.4@3180.51,2591.5 3180.51,2579.49 v1(3215,2545)
  Bottom Layer w10: v1@3215,2542.5 3217.5,2545 3350.36,2545 3365,2530.36 3365,2526.82 3366.82,2525 3640,2525 3650,2535 3650,2630 P1.16@3690,2670
POT_MOSI3: P1.28 U15_A3.4 | length 608.8
  Top Layer w10: U15_A3.4@3180.51,1976.5 3180.51,1964.49 v1(3215,1930)
  Bottom Layer w10: v1@3215,1927.5 3217.5,1930 3370.36,1930 3372.86,1927.5 3593.4,1927.5 3650,1984.1 3650,2015 3690,2055
POT_MOSI4: P1.40 U15_A4.4 | length 629.7
  Top Layer w10: U15_A4.4@3180.51,1365 3180.51,1352.99 v1(3215,1318.5)
  Bottom Layer w10: v1@3215,1316 3349.32,1316 3368.32,1335 3633.5,1335 3650,1351.5 3650,1440 3671.75,1461.75
POT_SCK1: P1.3 U15_A1.5 | length 253
  Top Layer w10: U15_A1.5@3374.49,3206.5 3446.5,3206.5 3525,3285 P1.3@3595,3285
POT_SCK2: P1.15 U15_A2.5 | length 253
  Top Layer w10: U15_A2.5@3369.49,2591.5 3441.5,2591.5 3520,2670 P1.15@3590,2670
POT_SCK3: P1.27 U15_A3.5 | length 265.5
  Top Layer w10: U15_A3.5@3369.49,1976.5 3441.5,1976.5 3550,2085 P1.27@3590,2085
POT_SCK4: P1.39 U15_A4.5 | length 270.2
  Top Layer w10: U15_A4.5@3369.49,1365 3441.5,1365 3561.5,1485 P1.39@3590,1485
SIG_A1: C4_A1.1 J1_A1.1 | length 345.4
  Top Layer w10: J1_A1.1@1150,3146.5 1320,3146.5 1385,3081.5 C4_A1.1@1468.5,3081.5
SIG_A2: C4_A2.1 J1_A2.1 | length 345.4
  Top Layer w10: J1_A2.1@1145,2531.5 1315,2531.5 1380,2466.5 C4_A2.1@1463.5,2466.5
SIG_A3: C4_A3.1 J1_A3.1 | length 345.4
  Top Layer w10: J1_A3.1@1145,1916.5 1315,1916.5 1380,1851.5 C4_A3.1@1463.5,1851.5
SIG_A4: C4_A4.1 J1_A4.1 | length 345.4
  Top Layer w10: J1_A4.1@1145,1305 1315,1305 1380,1240 C4_A4.1@1463.5,1240
pads on no net: U10_A1.8 U10_A2.8 U10_A3.8 U10_A4.8 U15_A1.1 U15_A2.1 U15_A3.1 U15_A4.1

## Polygon pours and split planes (outlines as drawn)
AGND_A4 on Top Layer "AGND" (solid, remove dead copper, pour order 2): 3540,1575 995,1575 995,1005 1000,1000 3545,1000 3545,1575 3540,1575
AGND_A3 on Top Layer "AGND" (solid, remove dead copper, pour order 12): 3545,2200 3545,1610 1000,1610 1000,2200 3545,2200
AGND_A2 on Top Layer "AGND" (solid, remove dead copper, pour order 22): 3545,2221.5 1000,2221.5 1000,2800 1005,2795 3545,2795 3545,2221.5
AGND_A1 on Top Layer "AGND" (solid, remove dead copper, pour order 34): 3545,2840 1000,2840 1000,3450 3545,3450 3545,2836.5
4.2V_A4 on Power "4.2V" (solid, remove dead copper, pour order 4): 995,1575 3545,1575 3545,1005 1000,1005 1000,1575
4.2V_A3 on Power "Power" (solid, remove dead copper, pour order 14): 3545,1610 1000,1610 1000,2200 3545,2200
4.2V_A2 on Power "Power" (solid, remove dead copper, pour order 30): 1000,2220 1000,2795 3545,2795 3545,2220 1000,2220
4.2V_A1 on Power "Power" (solid, remove dead copper, pour order 32): 3545,2840 3545,3450 1000,3450 1000,2840 3545,2840
AGND_A4 on Ground "AGND" (solid, remove dead copper, pour order 6): 1000,1575 3545,1575 3545,1005 1000,1005 1000,1570 1000,1575
AGND_A3 on Ground "AGND" (solid, remove dead copper, pour order 18): 1000,1610 1000,2200 3545,2200 3545,1610 1000,1610
AGND_A2 on Ground "AGND" (solid, remove dead copper, pour order 24): 1000,2795 3545,2795 3545,2220 1000,2220 1000,2795
AGND_A1 on Ground "AGND" (solid, remove dead copper, pour order 36): 3545,2840 1000,2840 1000,3450 3545,3450 3545,2840
AGND_A4 on Bottom Layer "AGND" (solid, remove dead copper, pour order 8): 1000,1575 3545,1575 3545,1005 1000,1005 1000,1575
AGND_A3 on Bottom Layer "AGND" (solid, remove dead copper, pour order 20): 1000,1610 1000,2200 3545,2200 3545,1610 1000,1610
AGND_A2 on Bottom Layer "AGND" (solid, remove dead copper, pour order 26): 1000,2795 3545,2795 3545,2220 1000,2220 1000,2795
AGND_A1 on Bottom Layer "AGND" (solid, remove dead copper, pour order 38): 3545,2840 1000,2840 1000,3450 3545,3450 3545,2840

## Keep-outs
Keep-Out Layer:
  the board outline again, w10

## Silkscreen, mask and mechanical layers (free items; w line width, h text height)
Top Overlay:
  lines w10: 1000,1610 3545,1610 ; 1000,2220 3545,2220 ; 1000,2840 3545,2840 ; 3545,1030 3545,1005 1000,1005 1000,3450 3545,3450 3545,3430 ; 1815,1055 1815,1170 1960,1170 1960,1055 1815,1055 ; 1815,1655 1960,1655 1960,1770 1815,1770 1815,1655 ; 1820,2275 1965,2275 1965,2390 1820,2390 1820,2275 ; 1820,2895 1965,2895 1965,3010 1820,3010 1820,2895
  text "OUTB1" at 2005,3350 h20
  text "OUTB2" at 2875,3345 h20
  text "OUTA2" at 2372.17,3213.43 h20
  text "OUTA1" at 1750,2975 h20
  text "A1" at 1850,2925 h60
  text "OUTB1" at 2005,2735 h20
  text "OUTB2" at 2865,2735 h20
  text "OUTA2" at 2372.17,2603.43 h20
  text "OUTA1" at 1740,2360 h20
  text "A2" at 1850,2305 h60
  text "OUTB1" at 2005,2120 h20
  text "OUTB2" at 2865,2115 h20
  text "OUTA2" at 2372.17,1988.42 h20
  text "OUTA1" at 1740,1750 h20
  text "A3" at 1845,1685 h60
  text "OUTB1" at 2000,1510 h20
  text "OUTB2" at 2865,1510 h20
  text "OUTA2" at 2377.17,1378.42 h20
  text "OUTA1" at 1740,1140 h20
  text "A4" at 1845,1085 h60
Bottom Overlay:
  lines w10: 1000,1610 3545,1610 ; 1000,2220 3545,2220 ; 1000,3450 1000,1005 3550,1005 3550,3450 1005,3450 ; 1005,2840 3550,2840 ; 1815,1055 1960,1055 1960,1170 1815,1170 1815,1055 ; 1815,1655 1960,1655 1960,1770 1815,1770 1815,1655 ; 1820,2275 1965,2275 1965,2390 1820,2390 1820,2275 ; 1820,2895 1820,3010 1965,3010 1965,2895 1820,2895
  text "A1" at 1930,2925 h60
  text "A2" at 1935,2305 h60
  text "A3" at 1930,1685 h60
  text "A4" at 1930,1085 h60